# Altium PCB DiPho_AFE.PcbDoc (part 2 of 2)
Units mm, origin at the board's own origin, x right, y up, seen from the top; angles counter-clockwise.
Board outline 25.2 x 25.2 mm, 4 copper layers (Top Layer, Inner Layer 1, Inner Layer 2, Bottom Layer), stack 1.51 mm thick; 49 components, 32 nets, 163 pads, 94 vias.
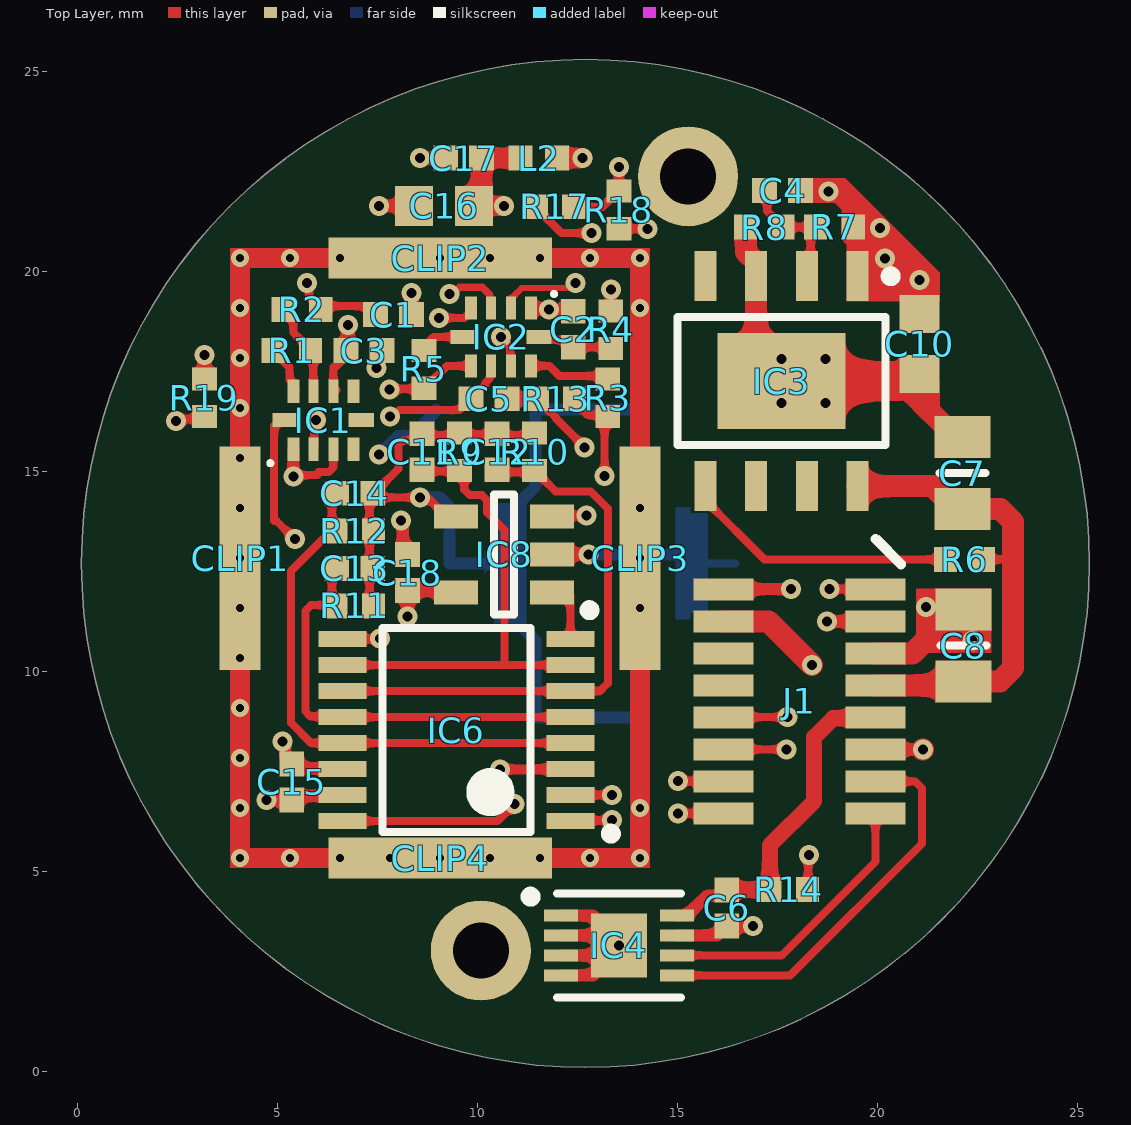
[diagram p0: Top Layer view]

## Other copper (continued)
Top Layer: (continued)
  region net GND: 14.317,5.084 14.317,20.584 13.817,20.584 13.817,5.084
  region net GND: 4.317,5.084 4.317,20.584 3.817,20.584 3.817,5.084
  rectangle net GND: 3.817,5.083 14.317,5.583
  rectangle net GND: 3.817,20.083 14.317,20.583
  region net P4V5: 18.388,22.332 19.197,22.332 21.557,19.972 21.557,19.255 19.232,19.255 19.232,20.668 19.103,20.797 19.103,21.537 18.928,21.712 18.388,21.712
Inner Layer 2:
  pour cut-out: 3.817,5.084 3.817,20.583 14.317,20.583 14.317,5.084

## Silkscreen, mask and mechanical layers (free items; w line width, h text height)
Bottom Overlay:
  text "DiPho AFE / v2.0" at 13.046,18.981 h1
  text "WUT ISE / 2022" at 16.256,2.44 h1
Mechanical 1:
  circle w0.1: c12.7,12.7 r12.6
  lines w0.254: 29.98,17.526 29.98,32.526 39.98,32.526 39.98,17.526 29.98,17.526
Mechanical 15:
  circle w0.05: c12.7,12.7 r11.25

## Text inside footprints (layer, text, board x,y; h text height)
D2: Bottom Overlay "C" at 8.74,13.45 h1.3 r180